# Altium PCB PCB1.PcbDoc
Units mil, origin at the board's own origin, x right, y up, seen from the top; angles counter-clockwise.
Board outline 1240.16 x 1161.42 mil, 2 copper layers (Top Layer, Bottom Layer); 8 components, 6 nets, 20 pads, 0 vias.
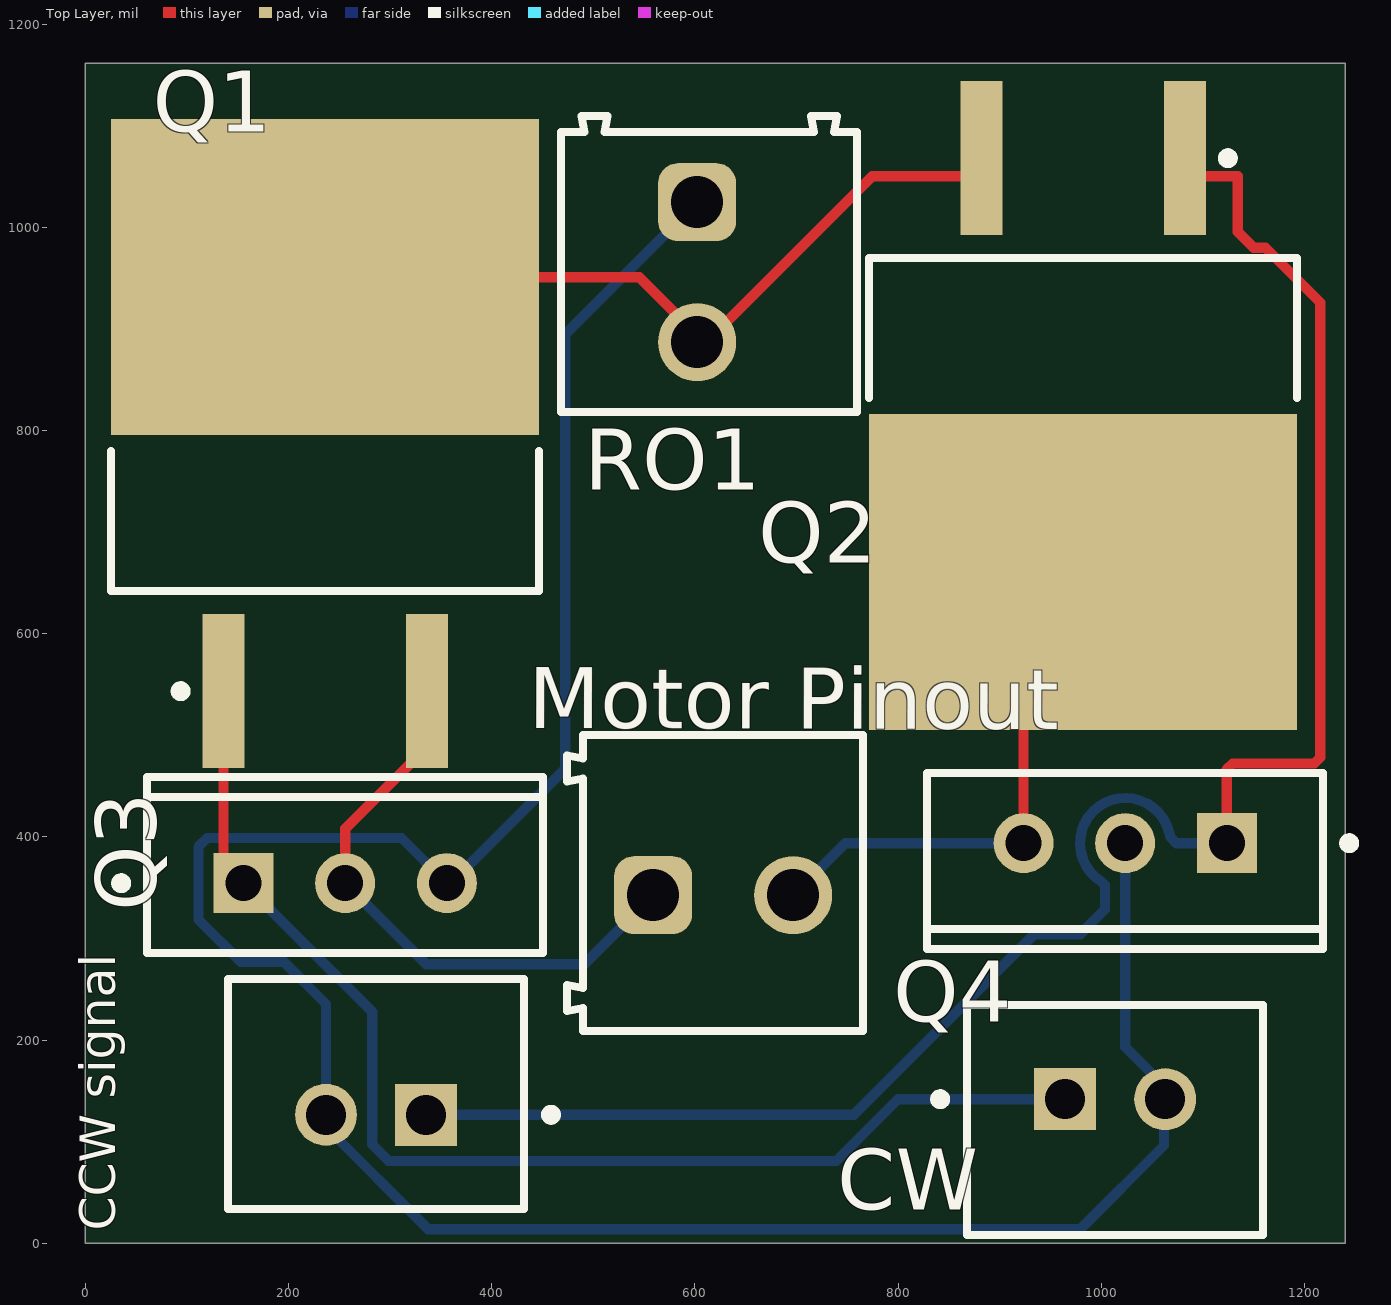
[diagram p0: Top Layer view]
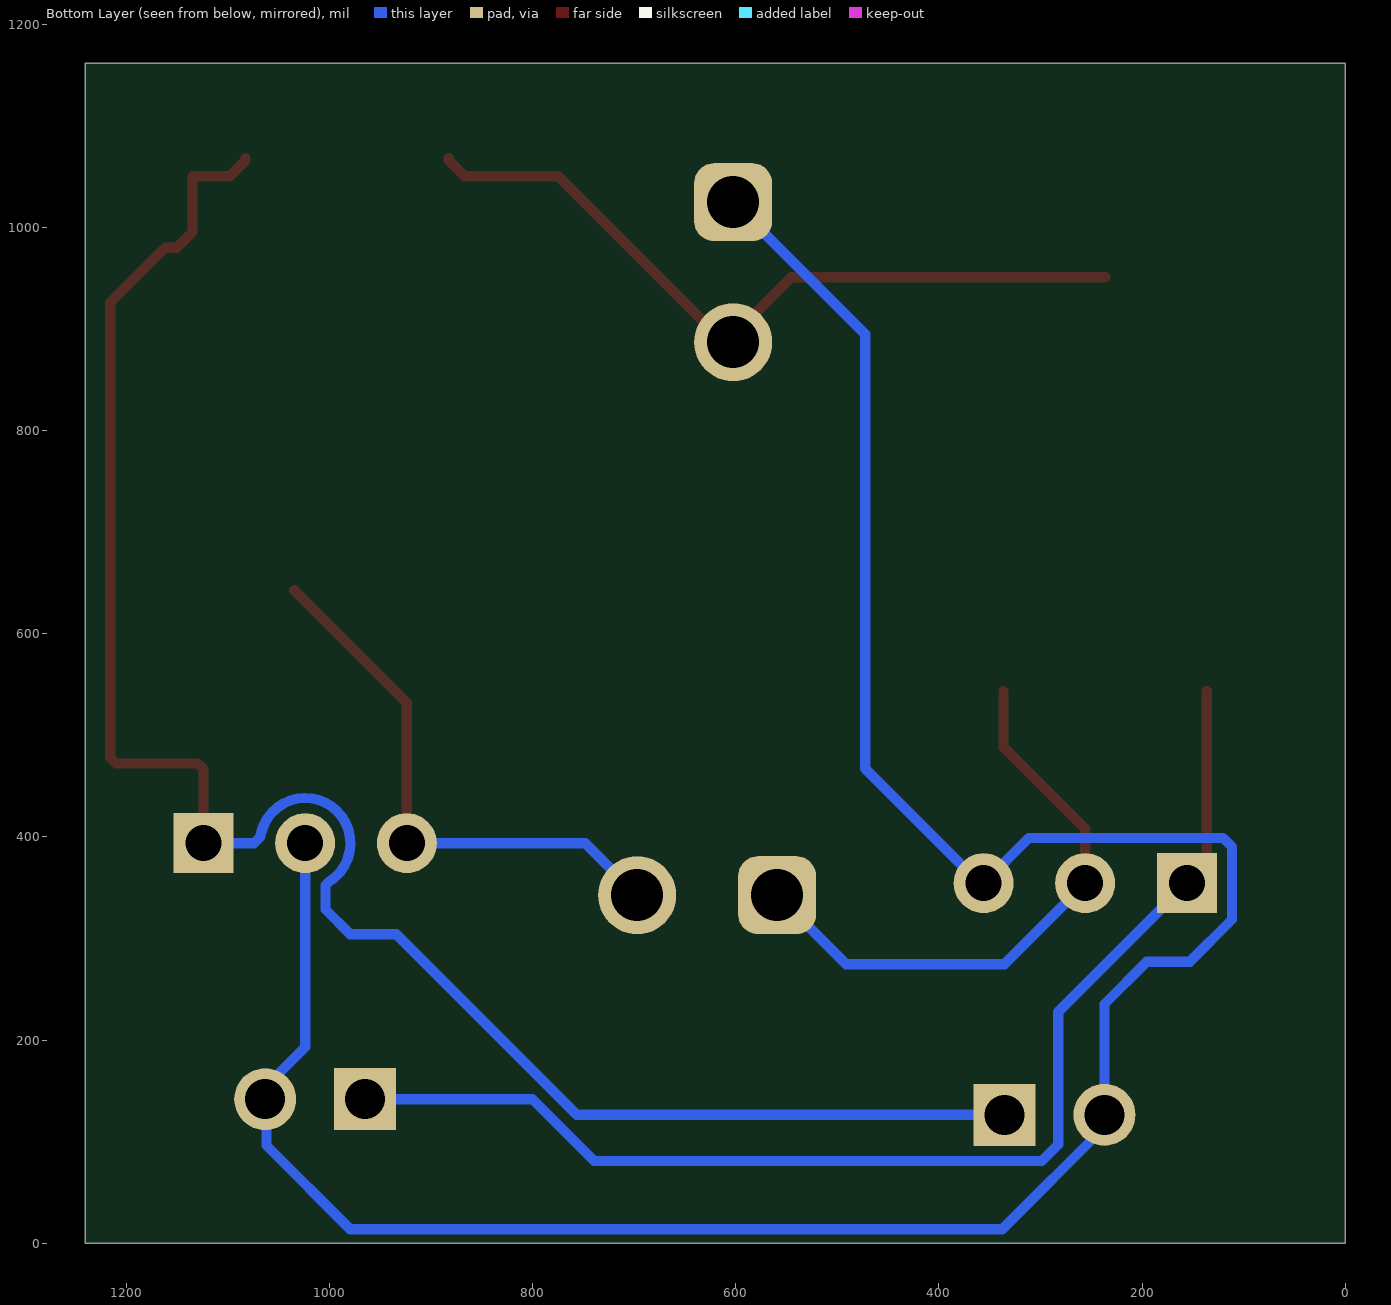
[diagram p1: Bottom Layer view, seen from below]
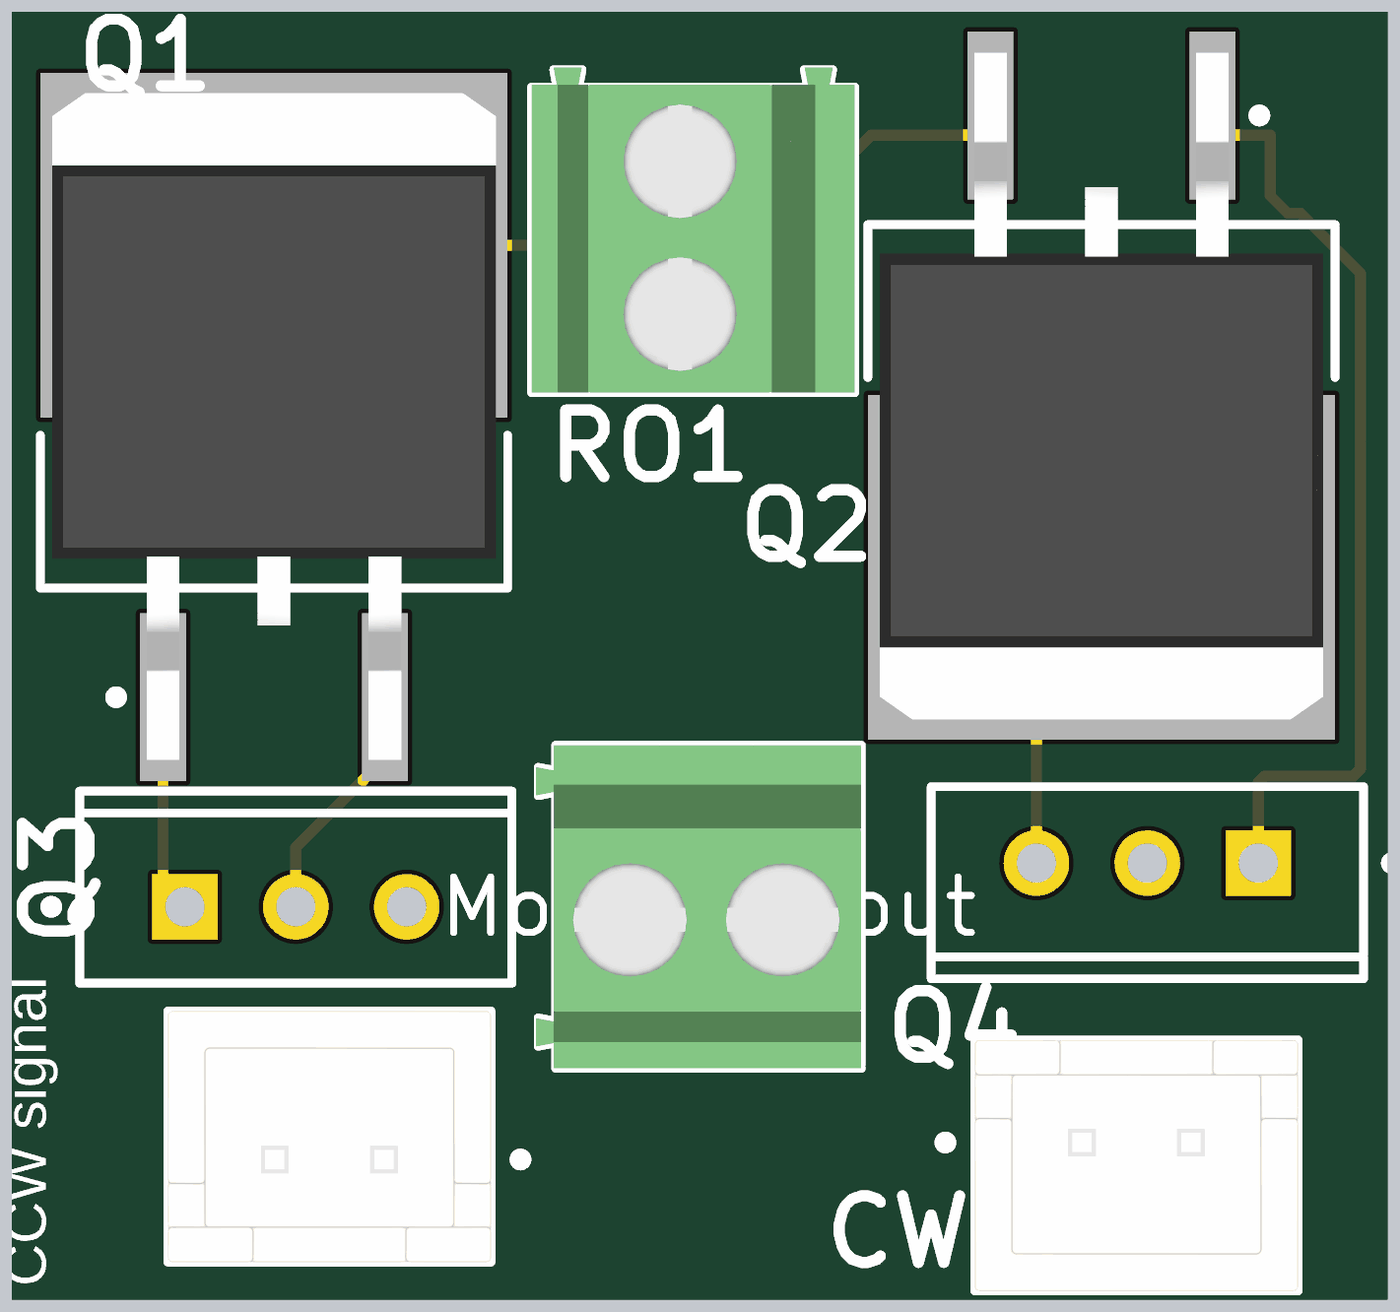
[diagram p2: 3D render of the assembled board from above, using the file's embedded part models]

## Layer stack, top to bottom
Top Solder: solder mask 0.4, Solder Resist, Dk 3.5
Top Layer: signal copper 1.4
Dielectric 1: dielectric 12.6, FR-4, Dk 4.8
Bottom Layer: signal copper 1.4
Bottom Solder: solder mask 0.4, Solder Resist, Dk 3.5

## Board outline
0,0 0,1161.42 1240.16,1161.42 1240.16,0

## Design rules (kind name [scope] priority, off if disabled: settings)
Clearance [All] p1: gap=10 ignorepadtopadclearanceinfootprint=FALSE
PolygonConnect [All] p1: connectstyle=Relief reliefconductorwidth=10 reliefentries=4 polygonreliefangle="90 Angle" airgapwidth=10
RoutingVias [All] p1: holewidth=28 width=50 viastyle="Through Hole" minholewidth=28 minwidth=50 maxholewidth=28 maxwidth=50
SolderMaskExpansion [All] p1: expansion=4 istentingtop=FALSE
SupplyNets "Schematic Supply Nets_1" [InNet('+12')] p1: voltage=0.000
SupplyNets "Schematic Supply Nets" [InNet('GND')] p2: voltage=0.000
Width [All] p1: maxlimit=10 minlimit=10 preferedwidth=10
30 further rules are at their usual default settings.

## Components (designator, comment, footprint, x,y, rotation, side; value= is the part's Value field where it differs from the comment)
"CCW signal" "B2B-XH-A(LF)(SN)" FP-B2B-XH-A_LF_SN-MFG 286.21,147.11 r180 top
CW "B2B-XH-A(LF)(SN)" FP-B2B-XH-A_LF_SN-MFG 1013.78,121.06 r0 top
"Motor Pinout" "691214110002" 691214110002 627.95,354.33 r0 top
Q1 "IRF5210SPBF" INTR-TO-263-3_L 236.22,787.4 r90 top
Q2 "IRF5210SPBF" INTR-TO-263-3_L 982.28,823.82 r270 top
Q3 "IRF3205PBF" INF-PG-TO-220AB 255.91,354.33 r90 top
Q4 "IRF3205PBF" INF-PG-TO-220AB 1023.62,393.7 r270 top
RO1 "691214110002" 691214110002 614.17,955.71 r270 top

## Footprints (in the part's own frame and the unit in brackets; to place one, negate y for a bottom-side part, rotate by r counter-clockwise, add the part's x,y. Pads: shape width x height; smd on the part's side, far side on the other; paste and mask are expansions set on the pad)
691214110002 [mm] "3.50 mm Horizontal Entry Modular, 2p"
  rrect50% 1.95x1.95 hole 1.3: 1(-1.75,-0.3)
  round 1.95 hole 1.3: 2(1.75,-0.3)
  silkscreen extent -3.9,-3.7 3.5,3.7, body extent -3.95,-3.7 3.5,3.7, height 8.55
FP-B2B-XH-A_LF_SN-MFG [mm]
  rect 1.55x1.55 hole 1 paste-2539.97 mask+0: 1(-1.25,0.525)
  round 1.55 hole 1 paste-2539.97 mask+0: 2(1.25,0.525)
  silkscreen extent -4.5,-2.88 3.7,2.88, body extent -3.8,-2.98 3.8,2.98, height 0.25
INF-PG-TO-220AB [mm] "FM, 3-Leads, Body 9.9x4.4mm, Pitch 2.54mm"
  rect 1.5x1.5 hole 0.9: 1(0,2.54)
  round 1.5 hole 0.9: 2(0,0) 3(0,-2.54)
  silkscreen extent -1.75,-4.95 2.65,5.72, body extent -1.75,-4.95 2.65,4.95, height 20.2
INTR-TO-263-3_L [mm] "D2-PAK, 3-Leads, Body 9.65x10.65mm, IPC High Density"
  rect 3.85x1.05 smd: 1(-6.2,2.54) 3(-6.2,-2.54)
  rect 7.9x10.7 smd: 4(4.15,0)
  silkscreen extent -6.32,-5.35 -0.2,5.35, body extent -7.63,-5.08 7.63,5.08, height 4.83

## Part data
"CCW signal" CW: library part CMP-2000-05888-3, "CONN HEADER VERT 2POS 2.5MM", Color=Natural, Contact Resistance=20mR, Current Rating=3A, Housing Color=White, Insulation Resistance=1GR, Max Operating Temperature=85°C, Max Voltage Rating (AC)=250V, Min Operating Temperature=-25°C, Connector Type="Male Pin", Contact Material=Brass, Contact Plating=Tin, Contact Type="Male Pin", Depth=5.75mm, Fastening Type=Detent, Housing Material=Polyamide, Lead Free="Lead Free", Lead Pitch=2.5mm, Length=7.4mm, Max Current Rating=3A, Max Voltage Rating (DC)=250V, Mount="Through Hole", Number of Contacts=2, Number of Positions=2, Number of Rows=1, Orientation=Straight, Packaging=Bulk, Pitch=2.5mm, REACH SVHC="No SVHC", Series=XH, Termination=Solder, Voltage Rating=250V, Voltage Rating (AC)=250V, Wire/Cable Gauge=22AWG
"Motor Pinout" RO1: library part CMP-1502-02464-2, Color="Blue, Green", Current=10A, Max Operating Temperature=105°C, Min Operating Temperature=-40°C, Voltage=300V, Contact Material=Brass, Contact Plating="Brass, Tin", Current Rating=10A, Height=8.7mm, Housing Material=Nylon, Lead Pitch=3.5mm, Length=7.4mm, Mount="Through Hole", NexarPartId=18818288, Number of Contacts=2, Number of Levels=1, Number of Pins=2, Number of Positions Per Level=2, Number of Rows=1, Packaging=Box, Pitch=3.5052mm, Plating="Brass, Steel", REACH SVHC=Unknown, RoHS=Compliant, Stripping Length=-6mm, Termination=Screw, Voltage Rating=300V, Width=7.9mm, Wire Gauge (Max)=24AWG, Wire Gauge (Min)=16AWG, Wire/Cable Gauge=24AWG
Q1 Q2: library part CMP-2000-06459-1, "HEXFET(R) Power MOSFET, 3.1 W, 63 ns, -55 to 150 degC, 3-Pin DPAK (TO-263AB), RoHS, Tube", Drain-Source On Resistance-Max=60mO, Drain-to-Source Voltage [Vdss]=100V, Manufacturer="International Rectifier", Package Description="3-Pin Transistor Outline, Body 9.015 x 10.16 mm, Pitch 2.54 mm", Package Reference=TO-263-3, Rated Power Dissipation=170W, Channel Type=P-Channel, Datasheet URL=https://datasheet.ciiva.com/15137/getdatasheetpartid-86705-15137623.pdf, Datasheet Version=08/2009, Manufacturer URL=http://internationalrectifier.com/, Mounting Technology=SurfaceMount, Qg Gate Charge=150nC
Q3 Q4: library part CMP-2000-04997-1, "HEXFET(R) Power N-Channel MOSFET, 55 V, 110 A, -55 to 117 degC, 3-Pin TO-220AB, RoHS, Rail/Tube", Manufacturer="International Rectifier", Maximum Continuous Drain Current=110A, Maximum Drain Source Resistance=0.008Ω, Maximum Drain Source Voltage=55V, Maximum Gate Source Voltage=±20V, Maximum Gate Threshold Voltage=4V, Maximum Operating Temperature=+175degC, Maximum Power Dissipation=200W, Minimum Gate Threshold Voltage=2V, Minimum Operating Temperature=-55degC, Package Description="3-Pin Plastic (Green) Transistor Single Outline Package, 9.9 x 9.2 mm Body, 2.54 mm Pitch", Package Reference=PG-TO-220AB, Package Type=TO-220AB, Package Version=Feb-04, Typical Input Capacitance @ Vds=3247pF@25V, Category=PowerMOSFET, Channel Mode=Enhancement, Channel Type=N, Datasheet URL=http://datasheet.octopart.com/IRF3205PBF-International-Rectifier-datasheet-10898897.pdf, Datasheet Version=Jul-10, Dimensions=10.54x4.69x8.77mm, Height=8.77mm, Length=10.54mm, Manufacturer URL=http://internationalrectifier.com/, Mounting Type=ThroughHole, Number of Elements per Chip=1, Package URL=http://www.infineon.com/dgdl/bts110.pdf?folderId=db3a304412b407950112b43583c16310&fileId=db3a304412b407950112b43584326311&sId=db3a30443e3c704d013e4eb6657a2604, Pin Count=3, Transistor Configuration=Single, Transistor Material=Si, Typical Gate Charge @ Vgs=146nC@10V, Typical Turn-Off Delay Time=50ns, Typical Turn-On Delay Time=14ns, Width=4.69mm

## Nets (pads, with @x,y where several pads share a name; then routed paths per layer and width w, separated by ;. In a path a pad name is that pad's centre, name@x,y a point inside that pad or via, vN(x,y) a via of type N, cw(c..) or ccw(c..) an arc to the next point about the centre after c; other vN are vias at no path point)
+12: Q1.4 Q2.3 RO1.2 | length 749.6
  Top Layer w10: Q1.4 545.28,950.79 610.24,885.83 774.61,1050.2 866.61,1050.2 882.28,1065.87 Q2.3
GND: "CCW signal.2" CW.2 Q3.3 Q4.2 RO1.1 | length 2608.6
  Bottom Layer w10: RO1.1 472.44,894.68 472.44,467.16 359.62,354.33 Q3.3 311.38,398.86 120.16,398.86 111.38,390.07 111.38,318.59 152.96,277.01 195.41,277.01 237,235.42 237,126.44 237,114.34 337.56,13.78 979.33,13.78 1061.77,96.22 1061.77,140.51 CW.2 1062.99,153.83 1023.62,193.2 Q4.2
"NetCCW signal_1": "CCW signal.1" Q2.1 Q4.1 | length 1860.6
  Top Layer w10: Q2.1 1082.28,1065.87 1097.95,1050.2 1134.45,1050.2 1134.45,995.42 1150.12,979.75 1161.67,979.75 1215.55,925.87 1215.55,478.06 1209.69,472.2 1129.48,472.2 1123.62,466.35 Q4.1
  Bottom Layer w10: 335.42,126.44 756.36,126.44 934.09,304.17 979.37,304.17 1003.62,328.43 1003.62,352.31 1000.69,355.24 999.94,356 cw(c1023.62,393.7) 1066.63,405.22 1068.15,399.56 1074.01,393.7 1077.22,393.7 Q4.1
NetCW_1: CW.1 Q1.1 Q3.1 | length 1220.7
  Top Layer w10: Q1.1 136.22,374.02 Q3.1
  Bottom Layer w10: Q3.1 282.51,227.73 282.51,97.11 298.7,80.93 739.13,80.93 799.94,141.73 CW.1
"NetMotor Pinout_1": "Motor Pinout.1" Q1.3 Q3.2 | length 597.2
  Top Layer w10: Q3.2 255.91,407.87 336.22,488.19 Q1.3
  Bottom Layer w10: Q3.2@263.4,361.83 Q3.2 335.63,274.61 491.14,274.61 559.06,342.52
"NetMotor Pinout_2": "Motor Pinout.2" Q2.4 Q4.3 | length 556.1
  Top Layer w10: Q4.3 923.62,531.89 Q2.4@1034.45,642.72
  Bottom Layer w10: 696.85,342.52 748.03,393.7 Q4.3 Q4.3@914.27,403.05